# Altium PCB Main_BCP.PcbDoc
Units mil, origin at the board's own origin, x right, y up, seen from the top; angles counter-clockwise.
Board outline 2175 x 2000 mil, 2 copper layers (Top Layer, Bottom Layer); 24 components, 12 nets, 101 pads, 0 vias.
Unrouted connection lines stored in the file: 48.
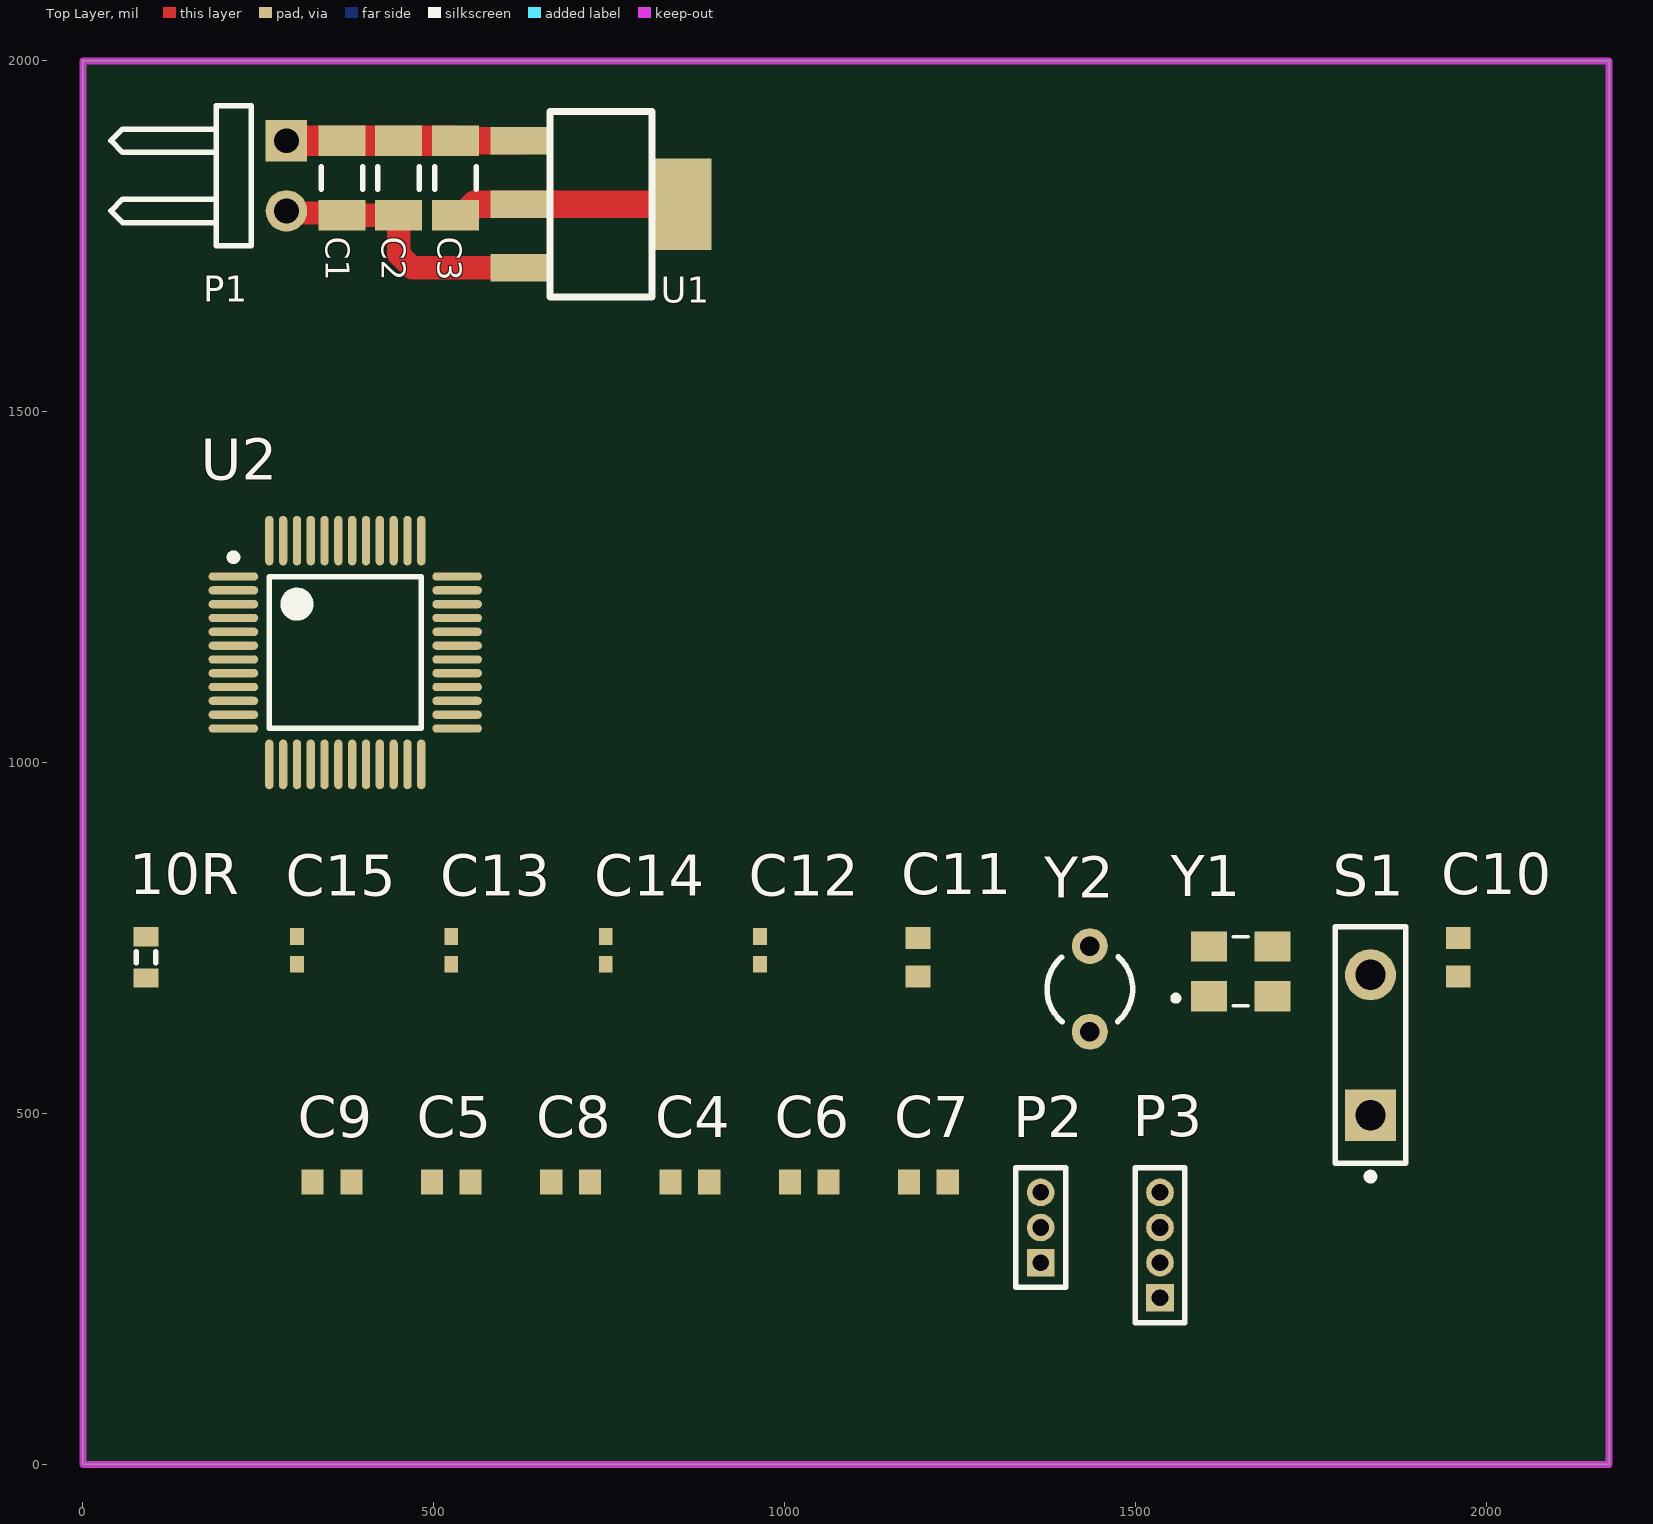
[diagram p0: Top Layer view]
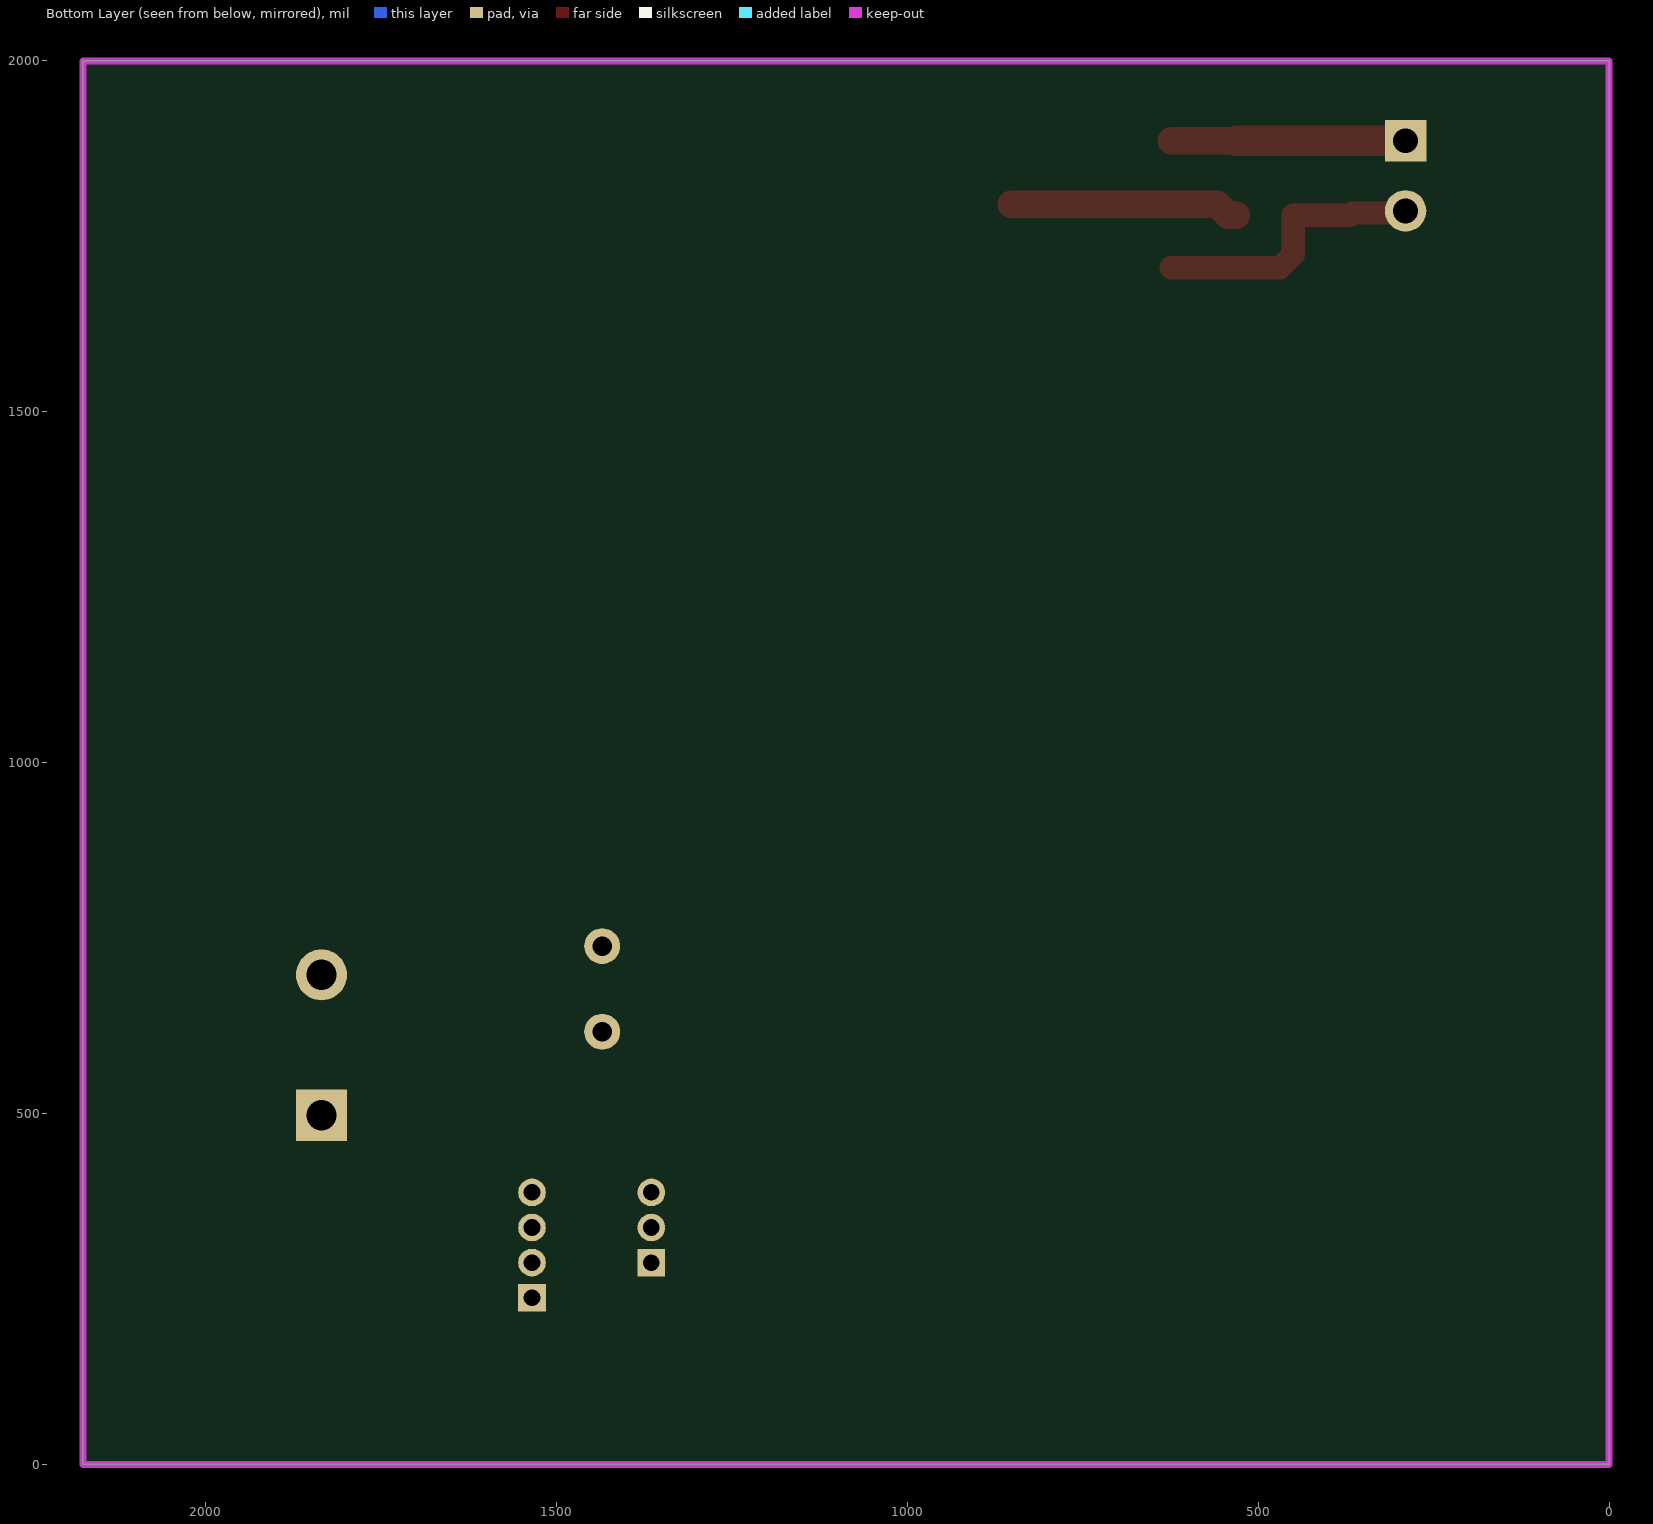
[diagram p1: Bottom Layer view, seen from below]

## Layer stack, top to bottom
Top Solder: solder mask 0.4, Solder Resist, Dk 3.5
Top Layer: signal copper 1.4
Dielectric 1: dielectric 12.6, FR-4, Dk 4.8
Bottom Layer: signal copper 1.4
Bottom Solder: solder mask 0.4, Solder Resist, Dk 3.5

## Board outline
0,0 2175,0 2175,2000 0,2000

## Design rules (kind name [scope] priority, off if disabled: settings)
Clearance [All] p1: gap=6 ignorepadtopadclearanceinfootprint=FALSE
PolygonConnect [All] p1: connectstyle=Relief reliefconductorwidth=10 reliefentries=4 polygonreliefangle="90 Angle" airgapwidth=10
RoomDefinition MCU_Schematic [InComponentClass('MCU_Schematic')] p1: confinementstyle=ConfineIn formatcopy=TRUE lockcomponents=FALSE outline 20,112.44 2125,112.44 2125,1477.44 20,1477.44
RoomDefinition Power_Supply [InComponentClass('Power_Supply')] p2: confinementstyle=ConfineIn formatcopy=TRUE lockcomponents=FALSE outline 15,1630 915,1630 915,1980 15,1980
RoutingVias [All] p1: holewidth=28 width=50 viastyle="Through Hole" minholewidth=28 minwidth=50 maxholewidth=28 maxwidth=50
SolderMaskExpansion [All] p1: expansion=4 istentingtop=FALSE
Width [All] p1: maxlimit=43 minlimit=10 preferedwidth=10
30 further rules are at their usual default settings.

## Classes and differential pairs
component class MCU_Schematic: 10R C4 C5 C6 C7 C8 C9 C10 C11 C12 C13 C14 C15 P2 P3 S1 U2 Y1 Y2
component class Power_Supply: C1 C2 C3 P1 U1

## Components (designator, comment, footprint, x,y, rotation, side; value= is the part's Value field where it differs from the comment)
10R "Res3" J1-0603 90,722.44 r90 top value=1K
C1 "Cap Semi" C1206 369,1833.15 r270 top value=100nF
C2 "Tantalum Cap" C1206 450,1833.15 r270 top value=10uF
C3 "Tantalum Cap" C1206 531,1833.15 r270 top value=100uF
C4 "Cap Semi" 1608[0603] 865,402.44 r0 top value=100nF
C5 "Cap Semi" 1608[0603] 525,402.44 r0 top value=100nF
C6 "Cap Semi" 1608[0603] 1035,402.44 r0 top value=10nF
C7 "Cap Semi" 1608[0603] 1205,402.44 r0 top value=100nF
C8 "Cap Semi" 1608[0603] 695,402.44 r0 top value=100nF
C9 "Cap Semi" 1608[0603] 355,402.44 r0 top value=100nF
C10 "Cap Semi" 1608[0603] 1960,722.44 r90 top value=4.7uF
C11 "Cap Semi" 1608[0603] 1190,722.44 r90 top value=100nF
C12 "Cap Semi" 0402 965,732.44 r90 top value=10pF
C13 "Cap Semi" 0402 525,732.44 r90 top value=10pF
C14 "Cap Semi" 0402 745,732.44 r90 top value=10pF
C15 "Cap Semi" 0402 305,732.44 r90 top value=10pF
P1 "Battery 9V" HDR1X2H 290,1886.3 r270 top
P2 "MHDR1X3" MHDR1X3 1365,287.44 r90 top
P3 "MHDR1X4" MHDR1X4 1535,237.44 r90 top
S1 "SW-PB" SPST-2 1835,597.44 r90 top
U1 "Low-Dropout Linear Regulator" "4-Pin SOT" 738.17,1663.86 r270 top
U2 "STM32F103C8T6" LQFP48_N 373.9,1156.89 r0 top
Y1 "ECS-80-12-33-JGN-TR3" XTAL_ECS-240-8-33-AGN-TR 1650,702.44 r0 top
Y2 "XTAL" R38 1435,677.44 r0 top

## Footprints (in the part's own frame and the unit in brackets; to place one, negate y for a bottom-side part, rotate by r counter-clockwise, add the part's x,y. Pads: shape width x height; smd on the part's side, far side on the other; paste and mask are expansions set on the pad)
"4-Pin SOT" [mm]
  rect 1x2.2 smd: 0(-1.05,-2.9) 1(-5.65,-2.9) 2(-3.35,-2.9)
  rect 3.3x2.2 smd: 2(-3.35,2.9)
  silkscreen extent -6.7,-1.85 0,1.85
0402 [mm] "Chip Capacitor, Body 1.0x0.5mm, IPC High Density"
  rect 0.6x0.5 smd: 1(-0.5,0) 2(0.5,0)
  body extent -0.55,-0.3 0.55,0.3, height 1.3
1608[0603] [mm] "Chip Capacitor, Body 1.6x0.8mm, IPC High Density"
  rect 0.8x0.9 smd: 1(-0.7,0) 2(0.7,0)
  body extent -0.87,-0.48 0.87,0.48, height 1.3
C1206 [mm] "Chip Capacitor, Body 3.2x1.6mm, IPC High Density"
  rect 1.1x1.7 smd: 1(-1.35,0) 2(1.35,0)
  silkscreen extent -0.4,-0.75 0.4,0.75, body extent -1.7,-0.9 1.7,0.9, height 1.3
HDR1X2H [mm] "Connector; Header; 2 Position; Right Angle"
  rect 1.5x1.5 hole 0.9: 1(0,0)
  round 1.5 hole 0.9: 2(2.54,0)
  silkscreen extent -1.27,-6.35 3.81,-1.27
J1-0603 [mm] "Chip Resistor, Body 1.6x0.8mm, IPC High Density"
  rect 0.7x0.9 smd: 1(-0.75,0) 2(0.75,0)
  silkscreen extent -0.2,-0.35 0.2,0.35, body extent -0.85,-0.48 0.85,0.48, height 0.9
LQFP48_N [mm] "Thin QFP, 48-Leads, Body 7x7mm, Pitch 0.5mm, IPC Medium Density"
  oval 1.8x0.3 smd: 1(-4.05,2.75) 2(-4.05,2.25) 3(-4.05,1.75) 4(-4.05,1.25) 5(-4.05,0.75) 6(-4.05,0.25) 7(-4.05,-0.25) 8(-4.05,-0.75) 9(-4.05,-1.25) 10(-4.05,-1.75) 11(-4.05,-2.25) 12(-4.05,-2.75) 25(4.05,-2.75) 26(4.05,-2.25) 27(4.05,-1.75) 28(4.05,-1.25) 29(4.05,-0.75) 30(4.05,-0.25) 31(4.05,0.25) 32(4.05,0.75) 33(4.05,1.25) 34(4.05,1.75) 35(4.05,2.25) 36(4.05,2.75)
  oval 0.3x1.8 smd: 13(-2.75,-4.05) 14(-2.25,-4.05) 15(-1.75,-4.05) 16(-1.25,-4.05) 17(-0.75,-4.05) 18(-0.25,-4.05) 19(0.25,-4.05) 20(0.75,-4.05) 21(1.25,-4.05) 22(1.75,-4.05) 23(2.25,-4.05) 24(2.75,-4.05) 37(2.75,4.05) 38(2.25,4.05) 39(1.75,4.05) 40(1.25,4.05) 41(0.75,4.05) 42(0.25,4.05) 43(-0.25,4.05) 44(-0.75,4.05) 45(-1.25,4.05) 46(-1.75,4.05) 47(-2.25,4.05) 48(-2.75,4.05)
  silkscreen extent -4.17,-2.75 2.75,3.57, body extent -3.5,-3.5 3.5,3.5, height 1.6
MHDR1X3 [mm] "Connector; Header; 3 Position"
  rect 1x1 hole 0.6: 1(0,0)
  round 1 hole 0.6: 2(1.27,0) 3(2.54,0)
  silkscreen extent -0.9,-0.9 3.44,0.9
MHDR1X4 [mm] "Connector; Header; 4 Position"
  rect 1x1 hole 0.6: 1(0,0)
  round 1 hole 0.6: 2(1.27,0) 3(2.54,0) 4(3.81,0)
  silkscreen extent -0.9,-0.9 4.71,0.9
R38 [mm] "Crystal, Thru-Hole; 2 Leads; Body 3.1 x 8.2 mm (Dia.xH)"
  round 1.3 hole 0.7: 1(0,1.55) 2(0,-1.55)
  silkscreen extent -1.55,-1.19 1.55,1.17
SPST-2 [mm] "Switch; 2 Leads"
  rect 1.85x1.85 hole 1.1: 1(-2.54,0)
  round 1.85 hole 1.1: 2(2.54,0)
  silkscreen extent -4.89,-1.27 4.28,1.27
XTAL_ECS-240-8-33-AGN-TR [mm]
  rect 1.3x1.1 smd: 1(-1.15,-0.9) 2(1.15,-0.9) 3(1.15,0.9) 4(-1.15,0.9)
  silkscreen extent -2.45,-1.25 0.27,1.25

## Part data
10R: "Resistor", LatestRevisionDate=29-May-2009, LatestRevisionNote="IPC-7351 Footprint Added.", PackageDescription="Chip Resistor", PackageReference=J1-0603, Published=8-Jun-2000, Publisher="Altium Limited"
C1 C4 C5 C6 C7 C8 C9 C10 C11 C12 C13 C14 C15: "Capacitor (Semiconductor SIM Model)", LatestRevisionDate=29-May-2009, LatestRevisionNote="IPC-7351 Footprint Added.", PackageDescription="Chip Capacitor", PackageReference=C1206, Published=8-Jun-2000, Publisher="Altium Limited"
C2 C3: library part "Cap Semi", "Capacitor (Semiconductor SIM Model)", LatestRevisionDate=29-May-2009, LatestRevisionNote="IPC-7351 Footprint Added.", PackageDescription="Chip Capacitor", PackageReference=C1206, Published=8-Jun-2000, Publisher="Altium Limited"
P1: library part "Header 2H", "Header, 2-Pin, Right Angle", Voltage=9V, LatestRevisionDate=17-Jul-2002, LatestRevisionNote="Re-released for DXP Platform.", Publisher="Altium Limited"
P2: "Header, 3-Pin", LatestRevisionDate=17-Jul-2002, LatestRevisionNote="Re-released for DXP Platform.", Publisher="Altium Limited"
P3: "Header, 4-Pin", LatestRevisionDate=17-Jul-2002, LatestRevisionNote="Re-released for DXP Platform.", Publisher="Altium Limited"
S1: "Switch", LatestRevisionDate=17-Jul-2002, LatestRevisionNote="Re-released for DXP Platform.", PackageDescription="Switch; 2 Leads", PackageReference=SPST-2, Published=24-Mar-1999, Publisher="Altium Limited"
U1: library part LM1117, "The LM1117 is a low dropout voltage regulator with a  / dropout of 1.2 V at 800 mA of load current.", Output Voltage=3.3V
U2: "STM32 ARM-based 32-bit MCU Performance Line with 64 kB Flash, 20 kB Internal RAM, -40 to +85°C Temperature, 48-Pin LQFP, Tray", ComponentLink1Description="Manufacturer URL", ComponentLink1URL=http://www.st.com/, ComponentLink2Description="STM32F103 Datasheet", ComponentLink2URL=http://www.st.com/internet/com/TECHNICAL_RESOURCES/TECHNICAL_LITERATURE/DATASHEET/CD00161566.pdf, ComponentLink3Description="STM32 Family Web Page", ComponentLink3URL=www.st.com/stm32, DatasheetVersion="rev13.0, Apr-2011", PackageDescription="48-Pin Low-Profile Quad Flat Pack, 7 x 7 mm Body, 0.5 mm Pitch (LQFP48)", PackageReference=LQFP48, PackageVersion="rev13, Apr-2011"
Y1: "Crystal 8MHz Â±20ppm (Tol) Â±30ppm (Stability) 12pF FUND 400Ohm 4-Pin Mini-CSMD T/R", Package=None, Availability="In Stock", Check_prices=https://www.snapeda.com/parts/ECS-80-12-33-JGN-TR3/ECS+Inc./view-part/?ref=eda, MF="ECS Inc.", MP=ECS-80-12-33-JGN-TR3, Price=None, Purchase-URL=https://pricing.snapeda.com/search/part/ECS-80-12-33-JGN-TR3/?ref=eda, SnapEDA_Link=https://www.snapeda.com/parts/ECS-80-12-33-JGN-TR3/ECS+Inc./view-part/?ref=snap
Y2: "Crystal Oscillator", LatestRevisionDate=17-Jul-2002, LatestRevisionNote="Re-released for DXP Platform.", PackageDescription="Crystal, Thru-Hole; 2 Leads; Body 3.1 x 8.2 mm (Dia.xH)", PackageReference=R38, Published=8-Jun-2000, Publisher="Altium Limited"

## Nets (pads, with @x,y where several pads share a name; then routed paths per layer and width w, separated by ;. In a path a pad name is that pad's centre, name@x,y a point inside that pad or via, vN(x,y) a via of type N, cw(c..) or ccw(c..) an arc to the next point about the centre after c; other vN are vias at no path point)
"32KHz 01": C12.2 U2.3 Y2.1
"32KHz 02": C14.2 U2.4 Y2.2
+3.3V: C3.2 C4.1 C5.2 C6.2 C7.2 C8.2 C9.2 C10.2 P2.1 P3.1 U1.2 U2.9 U2.24 U2.36 U2.48 | length 327.9
  Top Layer w39: C3.2 542.81,1780 558.37,1795.56 623.81,1795.56 624,1795.75 U1.2@852.35,1795.75
+9V: C1.2 C2.2 P1.2 U1.0 | length 400.1
  Top Layer w33: P1.2 293.15,1783.15 365.85,1783.15 C1.2 C2.2 450,1724.53 469.33,1705.2 U1.0
BOOT0: P2.2 U2.44
GND: C1.1 C2.1 C3.1 C4.2 C5.1 C6.1 C7.1 C8.1 C9.1 C10.1 C11.1 C12.1 C13.1 C14.1 C15.1 P1.1 P2.3 P3.4 S1.1 U1.1 U2.8 U2.23 U2.35 U2.47 Y1.2 Y1.4 | length 334
  Top Layer w39: C3.1 U1.1
  Top Layer w43: P1.1 C1.1 C2.1 C3.1
IN/OUT: 10R.2 C13.2 Y1.1
Net10R_1: 10R.1 U2.6
NRST: C11.2 S1.2 U2.7
OUT/IN: C15.2 U2.5 Y1.3
SWCLK: P3.3 U2.37
SWDIO: P3.2 U2.34
pads on no net: U2.1 U2.2 U2.10 U2.11 U2.12 U2.13 U2.14 U2.15 U2.16 U2.17 U2.18 U2.19 U2.20 U2.21 U2.22 U2.25 U2.26 U2.27 U2.28 U2.29 U2.30 U2.31 U2.32 U2.33 U2.38 U2.39 U2.40 U2.41 U2.42 U2.43 U2.45 U2.46

## Keep-outs
Keep-Out Layer:
  the board outline again, w10